# EAGLE board ThoraxSensor3.0.6_2024_VCNT2020 (EAGLE 9.6.2)
VERSION: v3.0.6b Nov 2024
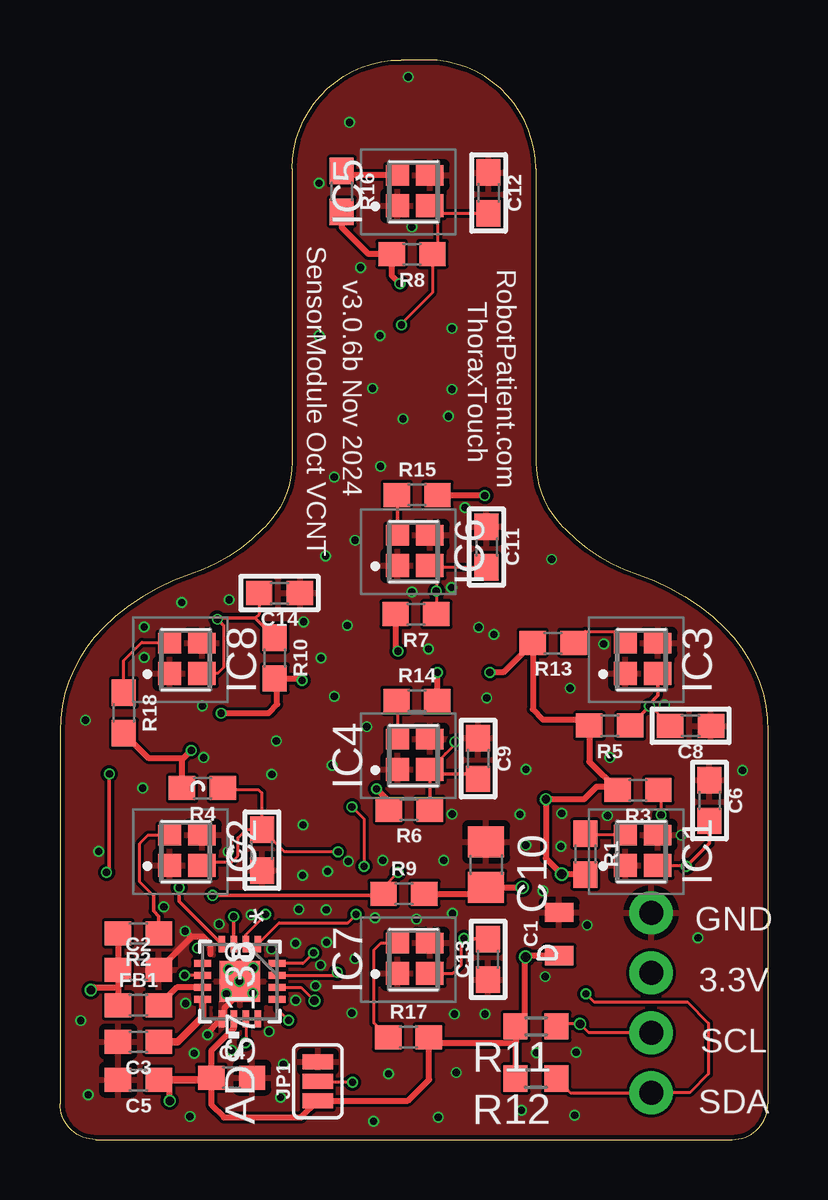
[diagram p0: board, top side]
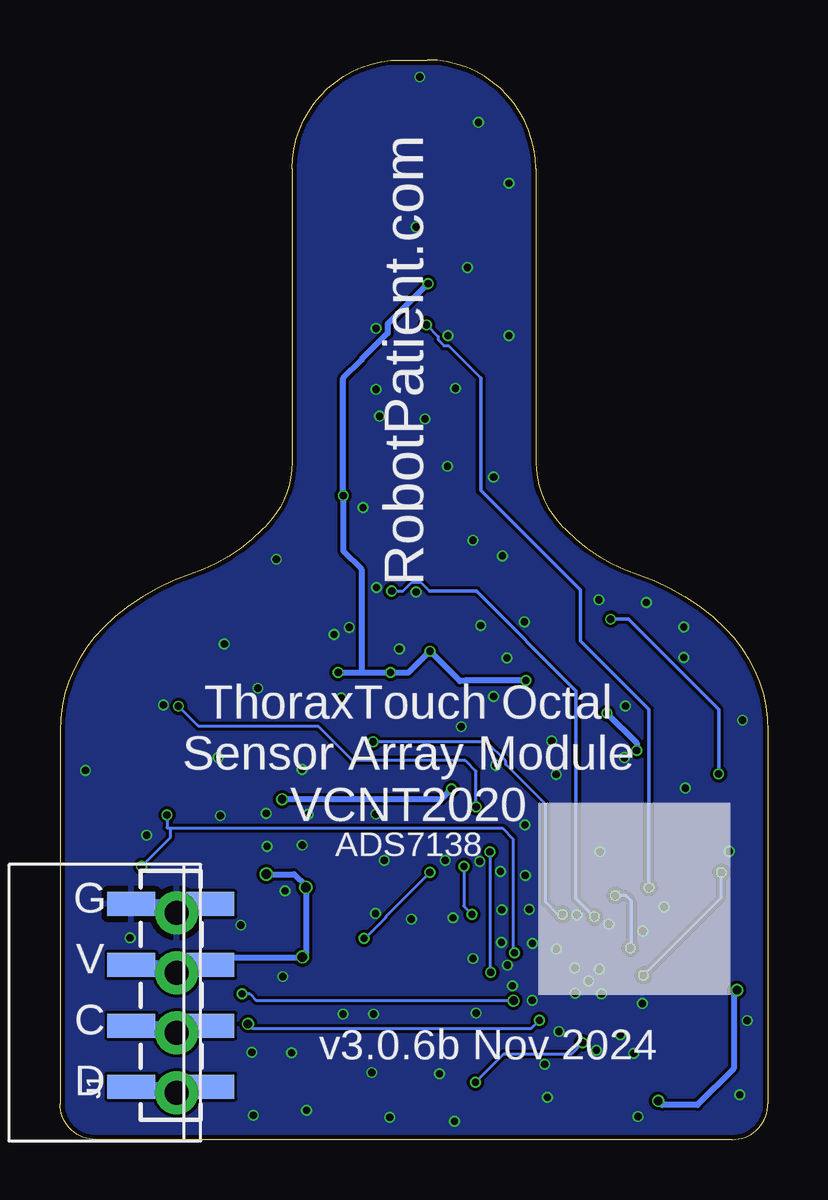
[diagram p1: board, bottom side, seen from below]

Size 29.52 x 45 mm. Coordinates in mm from the lower left corner, seen from the top.
Outline: 9.68,40.46 arc-90 14.22,45 15.3,45 arc-90 19.84,40.46 19.84,28.25 arc45 20.96,25.55 21.09,25.42 arc27 24.11,23.55 arc-27 27.74,21.31 arc-45 29.52,17.01 29.52,1.5 arc-90 28.02,0 1.5,0 arc-90 0,1.5 0,17.01 arc-45 1.78,21.31 arc-27 5.41,23.55 arc27 8.43,25.42 8.56,25.55 arc45 9.68,28.25 9.68,40.46
Copper layers (1*16): Top 0.035mm / dielectric 1.6mm / Bottom 0.035mm
Design rules "jlcpcb-2layers_2023": minimum track width 5mil, minimum drill 0.3mm, track to track 5mil, track to pad 5mil, pad to pad 5mil, via to via 5mil, smd to smd 5mil, copper to edge 0.2mm, drill to drill 6mil, minimum pad ring 10mil, minimum via ring 3mil, stop-mask expansion 4mil, vias tented up to drill 20mil, thermal gap 10mil
Net classes: 1 pwr: width 0.254 mm

## Footprints (pad centres in the part's own frame; a part is rotated, then mirrored left to right if it is on the bottom)
0805 = smd 0.8 x 1.2: 1 -0.9,0; 2 0.9,0
0603 = smd 1.1 x 1: 1 -0.85,0; 2 0.85,0
C0805 = smd 1.3 x 1.5: 1 -0.95,0; 2 0.95,0
VCNT2020 = smd 0.97 x 0.95: 1 -0.57,0.45 | smd 0.97 x 1.15: 2 -0.57,-0.9 | smd 0.85 x 0.95: 3 0.69,0.45 | smd 0.85 x 1.15: 4 0.69,-0.9
1X04_SMD_VERTICAL_COMBO = smd 1 x 2: 1 0,-1.65; 1-2 0,1.65; 2 2.54,1.65; 2-2 2.54,-1.65; 3 5.08,-1.65; 3-2 5.08,1.65; 4 7.62,1.65; 4-2 7.62,-1.65
SMT-JUMPER_3_1-NC_PASTE_SILK = smd 0.635 x 1.27: 1 -0.813,0; 2 0,0; 3 0.813,0
R0603 = smd 1 x 1.1: 1 -0.85,0; 2 0.85,0
QFN_8IRTER_TEX = smd 0.7 x 0.28: 1 -1.558,0.75; 2 -1.558,0.25; 3 -1.558,-0.25; 4 -1.558,-0.75; 9 1.558,-0.75; 10 1.558,-0.25; 11 1.558,0.25; 12 1.558,0.75 | smd 0.28 x 0.7: 5 -0.75,-1.558; 6 -0.25,-1.558; 7 0.25,-1.558; 8 0.75,-1.558; 13 0.75,1.558; 14 0.25,1.558; 15 -0.25,1.558; 16 -0.75,1.558 | smd 1.7 x 1.7: 17 0,0
PTSM_M4_TH_ANGLE_NEUTRAL_MIRRORED = drill 1: P1 3.75,1; P2 1.25,1; P3 -1.25,1; P4 -3.75,1

## Placement (x,y rotation side)
C1  10uF  [0805]  20.81,8.57 90 top
C2  1.0uF  [0603]  3.27,7.08 0 top
C3  1.0uF  [0603]  3.27,4.08 180 top
C4  1.0uF  [0603]  7.16,2.58 0 top
C5  100pF  [0603]  3.27,2.49 180 top
C6  0.1uF  [0603]  27.08,14.13 270 top
C7  0.1uF  [0603]  8.42,12.06 90 top
C8  0.1uF  [0603]  26.29,17.25 180 top
C9  0.1uF  [0603]  17.43,15.88 270 top
C10  10µF  [C0805]  17.77,11.46 270 top
C11  0.1uF  [0603]  17.78,24.7 270 top
C12  0.1uF  [0603]  17.87,39.46 270 top
C13  0.1uF  [0603]  17.85,7.51 90 top
C14  0.1uF  [0603]  9.15,22.78 180 top
FB1  30Ω  [0603]  3.27,5.59 0 top
IC1  VCNT2020  [VCNT2020]  24.02,12 90 top
IC2  VCNT2020  [VCNT2020]  5.02,12 90 top
IC3  VCNT2020  [VCNT2020]  24.02,20 90 top
IC4  VCNT2020  [VCNT2020]  14.52,16 90 top
IC5  VCNT2020  [VCNT2020]  14.52,39.5 90 top
IC6  VCNT2020  [VCNT2020]  14.52,24.5 90 top
IC7  VCNT2020  [VCNT2020]  14.52,7.5 90 top
IC8  VCNT2020  [VCNT2020]  5.02,20 90 top
J1  1X04_SMD_STRAIGHT_COMBO  [1X04_SMD_VERTICAL_COMBO]  24.9,2.2 90 bottom
JP1  JUMPER-SMT_3_1-NC_PASTE_SILK  [SMT-JUMPER_3_1-NC_PASTE_SILK]  10.75,2.43 90 top
R1  180  [0603]  21.9,11.9 270 top
R2  180  [0603]  3.27,8.6 180 top
R3  10k  [0603]  24.1,14.57 180 top
R4  10k  [0603]  5.94,14.65 180 top
R5  10k  [0603]  22.92,17.26 180 top
R6  10k  [0603]  14.56,13.75 180 top
R7  10k  [0603]  14.84,21.9 180 top
R8  10k  [0603]  14.68,36.91 180 top
R9  10k  [0603]  14.34,10.24 0 top
R10  10k  [0603]  8.95,20.07 270 top
R11  4k7  [R0603]  19.85,4.72 180 top
R12  4k7  [R0603]  19.84,2.54 180 top
R13  180  [0603]  20.56,20.7 180 top
R14  180  [0603]  14.88,18.29 0 top
R15  180  [0603]  14.89,26.87 0 top
R16  180  [0603]  11.74,39.52 270 top
R17  180  [0603]  14.53,4.27 0 top
R18  180  [0603]  2.66,17.78 270 top
U$9  ADS7138  [QFN_8IRTER_TEX]  7.5,6.59 270 top
U$13  PHOENIX_PTSM_M4_TH_ANGLEMIRRORED_SILK_I2C  [PTSM_M4_TH_ANGLE_NEUTRAL_MIRRORED]  23.65,5.7 90 bottom

## Library data of the parts
C1 = SparkFun-Capacitors; PROD_ID: CAP-11330
C2-C4 = SparkFun-Capacitors; PROD_ID: CAP-00868
C5 = SparkFun-Capacitors; PROD_ID: CAP-07883
C6-C9 C11-C14 = microbuilder
C10 = rcl; SPICEPREFIX: C
FB1 = SparkFun-Coils; PROD_ID: NDUC-07859
IC1-IC8 = VCNT2020; DESCRIPTION: Optical Switches, Reflective, Phototransistor Output Ref Optical Sensor Transtr Output 940nm; HEIGHT: 0mm; MANUFACTURER_NAME: Vishay; MANUFACTURER_PART_NUMBER: VCNT2020; MOUSER_PART_NUMBER: 78-VCNT2020; MOUSER_PRICE-STOCK: https://www.mouser.co.uk/ProductDetail/Vishay-Semiconductors/VCNT2020?qs=A6JNR%252BY%2FHHeERL3sVKpQTg%3D%3D
J1 = SparkFun-Connectors; PROD_ID: CONN-08511
JP1 = SparkFun-Jumpers
R1 R2 R13-R18 = SparkFun-Resistors; PROD_ID: RES-08788
R3-R10 = SparkFun-Resistors; PROD_ID: RES-00824
R11 R12 = rcl; SPICEPREFIX: R
U$9 = ADS7138
U$13 = jk_customs

## Nets
3.3V [pwr]: C1.1 C2.1 C4.1 C5.1 C10.2 FB1.1 J1.3 JP1.1 R1.2 R2.2 R3.2 R4.2 R5.2 R6.2 R7.2 R8.2 R9.2 R10.2 R11.2 R12.2 R13.2 R14.2 R15.2 R16.2 R17.2 R18.2 U$9.10 U$13.P2
ADDR: JP1.2 U$9.11
ALERT: U$9.12
DECAP: C3.1 U$9.8
GND [pwr]: C1.2 C2.2 C3.2 C4.2 C5.2 C6.1 C7.1 C8.1 C9.1 C10.1 C11.1 C12.1 C13.1 C14.1 IC1.1 IC1.4 IC2.1 IC2.4 IC3.1 IC3.4 IC4.1 IC4.4 IC5.1 IC5.4 IC6.1 IC6.4 IC7.1 IC7.4 IC8.1 IC8.4 J1.4 JP1.3 U$9.9 U$9.17 U$13.P1
N$1: IC1.3 R1.1
N$2: IC2.3 R2.1
N$3: IC3.3 R13.1
N$4: IC4.3 R14.1
N$5: IC6.3 R15.1
N$6: IC5.3 R16.1
N$7: IC7.3 R17.1
N$8: IC8.3 R18.1
N$10: FB1.2 U$9.7
S1: C6.2 IC1.2 R3.1 U$9.16
S2: C7.2 IC2.2 R4.1 U$9.15
S3: C8.2 IC3.2 R5.1 U$9.1
S4: C9.2 IC4.2 R6.1 U$9.2
S5: C11.2 IC6.2 R7.1 U$9.3
S6: C12.2 IC5.2 R8.1 U$9.4
S7: C13.2 IC7.2 R9.1 U$9.5
S8: C14.2 IC8.2 R10.1 U$9.6
SCL: J1.2 R11.1 U$9.13 U$13.P3
SDA: J1.1 R12.1 U$9.14 U$13.P4

## Tracks (layer width: path | path; a pad name or v marks a point on that pad's centre or on a via)
3.3V  (via drill 0.3, 0.35, 0.4)
  Top 0.254: C5.1 4.58,2.49 v4.58,1.61 | U$9.10 7.25,4.63 6.31,3.69 C4.1 6.31,1.45 6.84,0.92 10.05,0.92 JP1.1 14.51,1.62 15.39,2.5 R17.2 15.61,4.04 18.99,4.04 | 18.99,4.04 R12.2 | 18.99,4.04 19,4.04 R11.2 19.39,5.11 19.39,7.59 v19.41,7.61 19.47,7.67 C1.1 | R9.2 17.5,10.24 C10.2 v19.27,10.51 | R2.2 C2.1 2.42,6.35 | 2.42,6.35 FB1.1 | v1.29,6.23 1.41,6.35 2.42,6.35 | R15.2 17.68,26.87 v17.71,26.84 | R7.2 13.99,20.46 v14.09,20.36 | v14.17,35.68 13.83,36.02 R8.2 12.86,36.91 11.74,38.03 R16.2 | R1.2 v20.93,11.05 v20.92,11.06 20.26,11.72 v20.26,14.18 21.85,14.18 22.38,14.71 23.11,14.71 R3.2 22.07,15.75 R5.2 21.82,17.51 20.14,17.51 19.71,17.94 R13.2 18.48,19.47 v17.92,19.47 | R14.2 v15.73,19.46 v15.74,19.47 | v13.2,14.61 13.71,14.1 R6.2 | v10.09,19.14 10.01,19.22 R10.2 9.06,19.22 9.06,18.14 8.69,17.77 v6.72,17.77 | R18.2 3.7,15.89 5.09,15.89 | R4.2 5.09,15.89 | v5.47,16.23 5.14,15.89 5.09,15.89
  Top 0.305: C5.1 6.22,2.49 C4.1
  Bottom 0.254: v17.92,19.47 16.95,19.47 | 16.95,19.47 v15.74,19.47 14.98,19.47 v14.09,20.36 12.85,19.11 12.63,19.11 12.6,19.14 v10.09,19.14 | v20.26,14.18 13.63,14.18 v13.2,14.61 | v1.29,6.23 1.43,6.09 1.43,2.95 2.94,1.44 4.41,1.44 v4.58,1.61 | U$13.P2 24.32,7.28 J1.3 22.94,7.59 19.43,7.59 v19.41,7.61 19.27,7.75 v19.27,10.51 19.27,10.57 19.76,11.06 v20.92,11.06 | 16.95,19.47 16.95,23.78 17.71,24.54 v17.71,26.84 17.71,31.73 16.94,32.5 16.94,32.53 15.86,33.61 15.86,33.99 v14.17,35.68 | v6.72,17.77 5.47,16.52 v5.47,16.23
ADDR  (via drill 0.3)
  Top 0.127: U$9.11 7.75,4.05 v7.73,4.03 | v12.2,2.38 10.8,2.38 JP1.2
  Bottom 0.127: v7.73,4.03 8.18,3.58 11,3.58 v12.2,2.38
DECAP
  Top 0.305: U$9.8 5.94,5.11 4.91,4.08 C3.1
GND  (via drill 0.3)
  Top 0.254: U$9.17 7.5,6.13 6.86,5.49 6.86,5.14 U$9.9 6.05,4.33 | C2.2 5.5,8.46 | 5.5,8.46 5.94,8.46 6.27,8.13 6.27,7.73 | v5.22,8.69 5.45,8.46 5.5,8.46
  other vias: 7.03,7.1 6.94,6.07 8.04,6.1 7.48,6.6 8.06,7.15 0.87,4.96 1.18,1.86 5.42,0.96 13.7,2.74 13.07,0.76 15.77,0.93 16.52,2.79 19.24,1.22 21.46,1.01 21.52,3.64 19.86,3.61 25.9,12.69 16.36,9.42 9.02,16.61 1.06,17.48 1.61,12.01 11.35,15.6 19.43,15.43 12.79,17.21 17.79,18.41 17.46,21.35 11.98,21.43 20.5,24.19 22.67,20.66 28.46,15.38 20.23,6.79 26.6,8.41 16.2,30.15 13.34,33.51 10.8,33.51 10.8,39.86 11.07,24.33 5.07,22.38 3.51,20.09 5.6,3.6 9.2,1.76 9.83,5.8 8.82,7.94 4.33,9.7 7.01,12 10.12,11.01 10.13,13.11 8.83,15.22 5.99,15.92 3.45,14.65 5.94,18.07 7.05,22.5 10.15,21.58 15.37,20.45 12.3,24.98 16.89,26.34 13.36,28.06 14.3,30.04 13.03,31.31 16.34,33.81 14.67,38.04 14.52,44.29 11.44,18.47 10.89,20.07 11.44,27.62 16.35,13.56 10.86,7.27 10.65,6.41 8.72,4.5 6.16,4.37 7.16,3.72 5.24,5.67 6.63,8.98 7.97,9.37 9.96,9.59 9.82,8.18 13.46,11.63 12.02,11.59 13.13,9.24 16,11.63 14.87,9.19 11.15,11.18 11.1,9.57 11.11,8.22 12.3,7.54 9.31,3.14 21.98,8.94 25.21,18.12 17.72,5.23 16.45,5.23 12.17,5.27 16.32,23.01 14.67,22.82 16.34,31.27 12.53,36.35 21.27,18.81 19.18,13.55 19.42,12.27 20.89,12.22 20.92,13.59 22.83,13.5 20.13,10.37 22.93,15.92 18.09,21.05 12.07,42.4 3.51,21.36
  pour Top: -3.02,45.72 37.62,45.72 37.62,-5.08 -5.56,-5.08 -5.56,45.72
  pour Bottom: 40.16,46.99 40.16,-6.35 -3.02,-6.35 -3.02,46.99
N$1
  Top 0.127: IC1.3 21.96,12.69 R1.1
N$2
  Top 0.127: 3.9,10.16 3.33,10.73 3.33,12.34 3.68,12.69 IC2.3
  Top 0.152: R2.1 4.12,9.3 3.9,9.52 3.9,10.16
N$3
  Top 0.127: R13.1 21.89,21.18 23.15,21.18 23.57,20.76 IC3.3
N$4
  Top 0.127: R14.1 14.07,18.25 IC4.3
N$5
  Top 0.152: IC6.3 14.07,26.84 R15.1
N$6
  Top 0.254: IC5.3 11.92,40.19 R16.1
N$7
  Top 0.127: R17.1 13.09,4.86 13.09,7.9 13.38,8.19 IC7.3
N$8
  Top 0.127: R18.1 2.66,19.97 3.41,20.72 4.54,20.72 IC8.3
N$10
  Top 0.254: U$9.7 4.87,6.34 FB1.2
S1  (via drill 0.3)
  Top 0.127: v10.57,7.78 10.13,7.34 U$9.16 | R3.1 25.06,14.46 v25.06,13.53 | IC1.2 26.07,11.43 v26.12,11.38
  Top 0.152: C6.2 27.08,12.34 v26.12,11.38
  Bottom 0.127: v10.57,7.78 10.63,7.84 10.63,12.53 11.08,12.98 24.92,12.98 | 24.92,12.98 25.04,12.98 25.06,13 v25.06,13.53 | 24.92,12.98 24.92,12.58 v26.12,11.38
S2  (via drill 0.3)
  Top 0.127: U$9.15 11.43,6.84 v11.56,6.97 | v11.6,11.99 9.37,11.99 8.46,12.9 C7.2 | IC2.2 6.07,11.58 7.18,11.58 7.43,11.83 7.43,12.58 7.75,12.9 C7.2 | R4.1 6.85,14.59 8.27,14.59 8.41,14.45 C7.2
  Bottom 0.127: v11.6,11.99 11.6,7.01 v11.56,6.97
S3  (via drill 0.3)
  Top 0.127: U$9.1 9.14,9.04 12,9.04 v12.34,9.38 | v12.17,13.87 12.68,13.36 v12.68,11.39 | C8.2 24.63,18.06 | 24.63,18.06 v24.58,18.06 | 24.73,18.32 24.63,18.22 24.63,18.06
  Top 0.152: IC3.2 24.92,18.51 24.73,18.32 | R5.1 v24.58,18.06
  Bottom 0.127: v12.68,11.39 12.68,9.72 v12.34,9.38 | v12.17,13.87 12.17,15.35 12.62,15.8 17.33,15.8 18.77,17.23 23.75,17.23 v24.58,18.06
S4  (via drill 0.3)
  Top 0.127: U$9.2 7.75,8.55 8.57,9.37 v8.57,9.39 | IC4.2 16.06,16.07 16.07,16.07 16.47,16.47 v16.47,16.58
  Top 0.152: IC4.2 15.42,15.24 | 15.42,15.24 R6.1 | C9.2 17.22,15.24 15.42,15.24
  Bottom 0.127: v8.57,9.39 8.78,9.39 9.27,9.88 9.27,13.97 10.93,15.63 10.93,15.77 11.74,16.58 v16.47,16.58
S5  (via drill 0.3)
  Top 0.127: R7.1 v15.69,22.86 15.69,23.66 | C11.2 15.88,23.85 15.69,23.66 | IC6.2 15.69,23.66
  Top 0.152: v7.24,9.29 U$9.3
  Bottom 0.127: v15.69,22.86 15.22,22.86 14.84,23.24 14.5,23.24 14.12,22.86
  Bottom 0.15: 8,18.7 12.16,22.86 14.12,22.86
  Bottom 0.152: 8,18.7 8,10.03 7.26,9.29 v7.24,9.29
S6  (via drill 0.3)
  Top 0.127: 15.74,38.61 15.74,37.12 | IC5.2 15.74,38.61 | 15.74,38.61 C12.2 | R8.1 15.53,35.3 14.24,34.01 v14.24,33.96
  Top 0.152: U$9.4 4.97,9.93 v4.97,10.5 | 15.74,37.12 R8.1
  Bottom 0.127: 11.97,31.75 13.31,33.09 13.51,33.09 13.76,33.34 13.76,33.48 v14.24,33.96
  Bottom 0.152: v4.97,10.5 4.97,17.93 7.82,20.78 7.82,22.9 11.97,27.05 11.97,31.75
S7  (via drill 0.3)
  Top 0.127: v14.1,11.13 13.49,10.52 R9.1 13.42,10.17 | IC7.2 16.38,6.93 16.73,7.28 16.73,8.36 16.73,8.38
  Top 0.152: 13.42,10.17 v6.37,10.17 | v5.74,7.98 5.94,7.78 U$9.5 | C13.2 16.73,8.36 | 16.73,8.38 v16.84,8.38
  Bottom 0.127: v14.1,11.13 15.94,9.29 15.94,9.25 16.81,8.38 v16.84,8.38
  Bottom 0.152: v6.37,10.17 5.93,10.17 5.7,9.94 5.7,8.02 v5.74,7.98
S8  (via drill 0.3)
  Top 0.127: C14.2 8.3,21.89 8.14,21.73 | U$9.6 v5.2,6.84 | v5.2,6.84 | IC8.2 6.58,19.43 6.82,19.67 6.82,21.43
  Top 0.152: v1.94,11.14 2.06,11.26 v2.06,15.24 | 6.82,21.43 v6.56,21.69 6.6,21.73 8.14,21.73 R10.1
  Bottom 0.127: v5.2,6.84 1.94,10.1 v1.94,11.14
  Bottom 0.152: v2.06,15.24 2.06,17.92 5.83,21.69 v6.56,21.69
SCL  (via drill 0.3, 0.35)
  Top 0.127: U$9.13 9.06,5.44 v9.53,4.97 | R11.1 20.8,4.82 v21.68,4.82 22.05,4.45 U$13.P3
  Bottom 0.127: v9.53,4.97 9.87,4.63 21.49,4.63 v21.68,4.82
  Bottom 0.152: J1.2 24.94,4.74 U$13.P3
SDA  (via drill 0.3, 0.35)
  Top 0.127: U$9.14 10.06,6.34 v10.61,5.79 | v21.93,6.07 22.27,5.73 26.16,5.73 27.04,4.85 27.04,2.73 26.26,1.95 U$13.P4 21.28,1.95 R12.1
  Bottom 0.127: v10.61,5.79 21.32,5.79 21.6,6.07 v21.93,6.07
  Bottom 0.152: J1.1 24.4,2.2 U$13.P4

## Text on the board
_tsilk: RobotPatient.com / ThoraxTouch | SensorModule Oct VCNT
_bsilk: RobotPatient.com | ThoraxTouch Octal / Sensor Array Module / VCNT2020 | ADS7138 | G | V | C | D